# Altium PCB AMS.PcbDoc (part 1 of 3)
Units mm, origin at the board's own origin, x right, y up, seen from the top; angles counter-clockwise.
Board outline 150 x 60 mm, 4 copper layers (Top Layer, Layer 1, Layer 2, Bottom Layer), stack 0.603 mm thick; 208 components, 140 nets, 599 pads, 192 vias.
Unrouted connection lines stored in the file: 272.
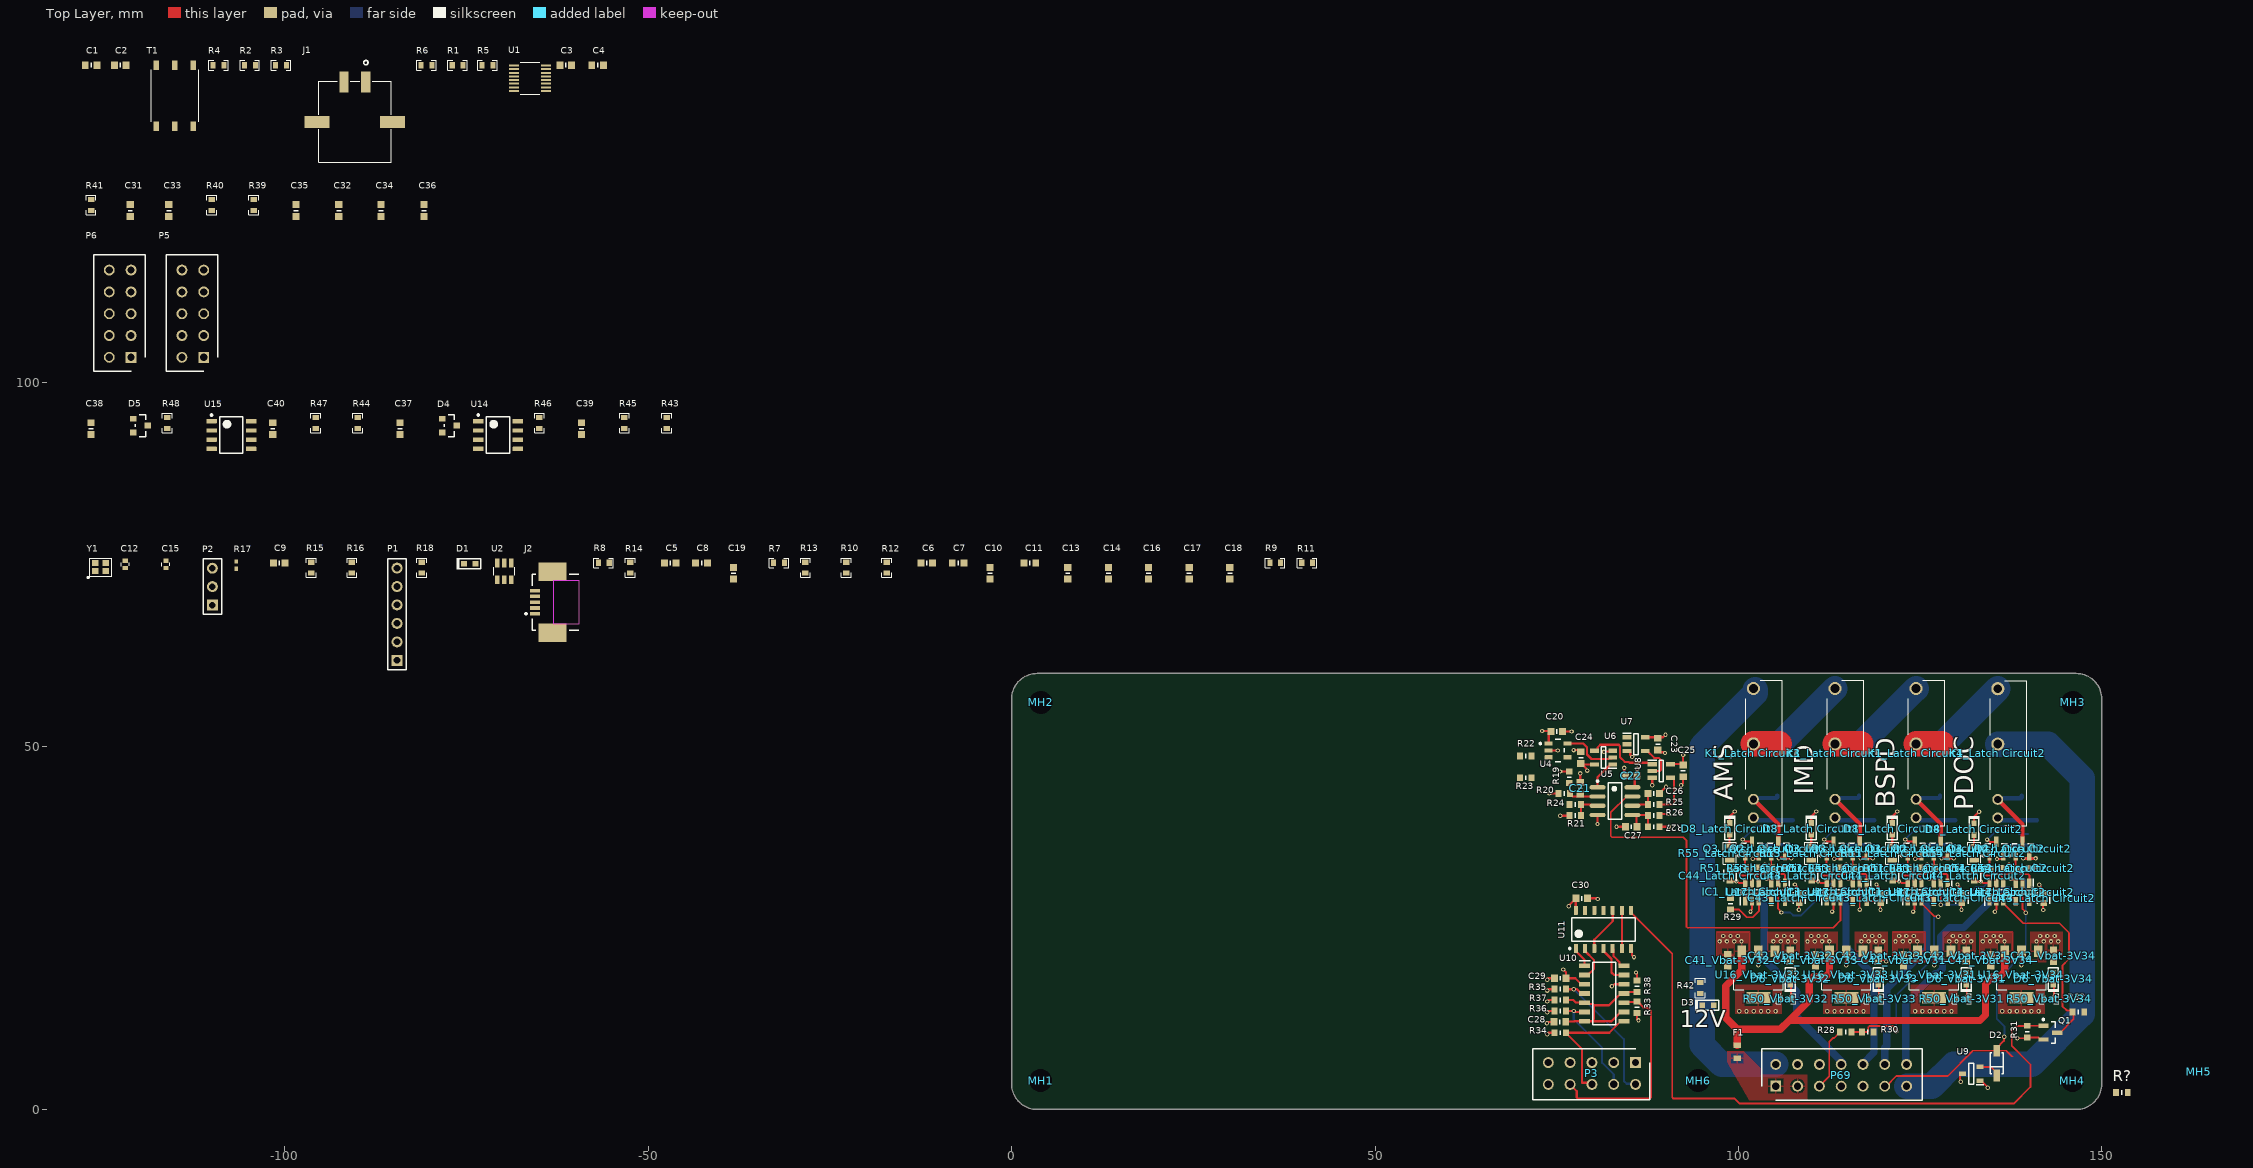
[diagram p0: Top Layer view]
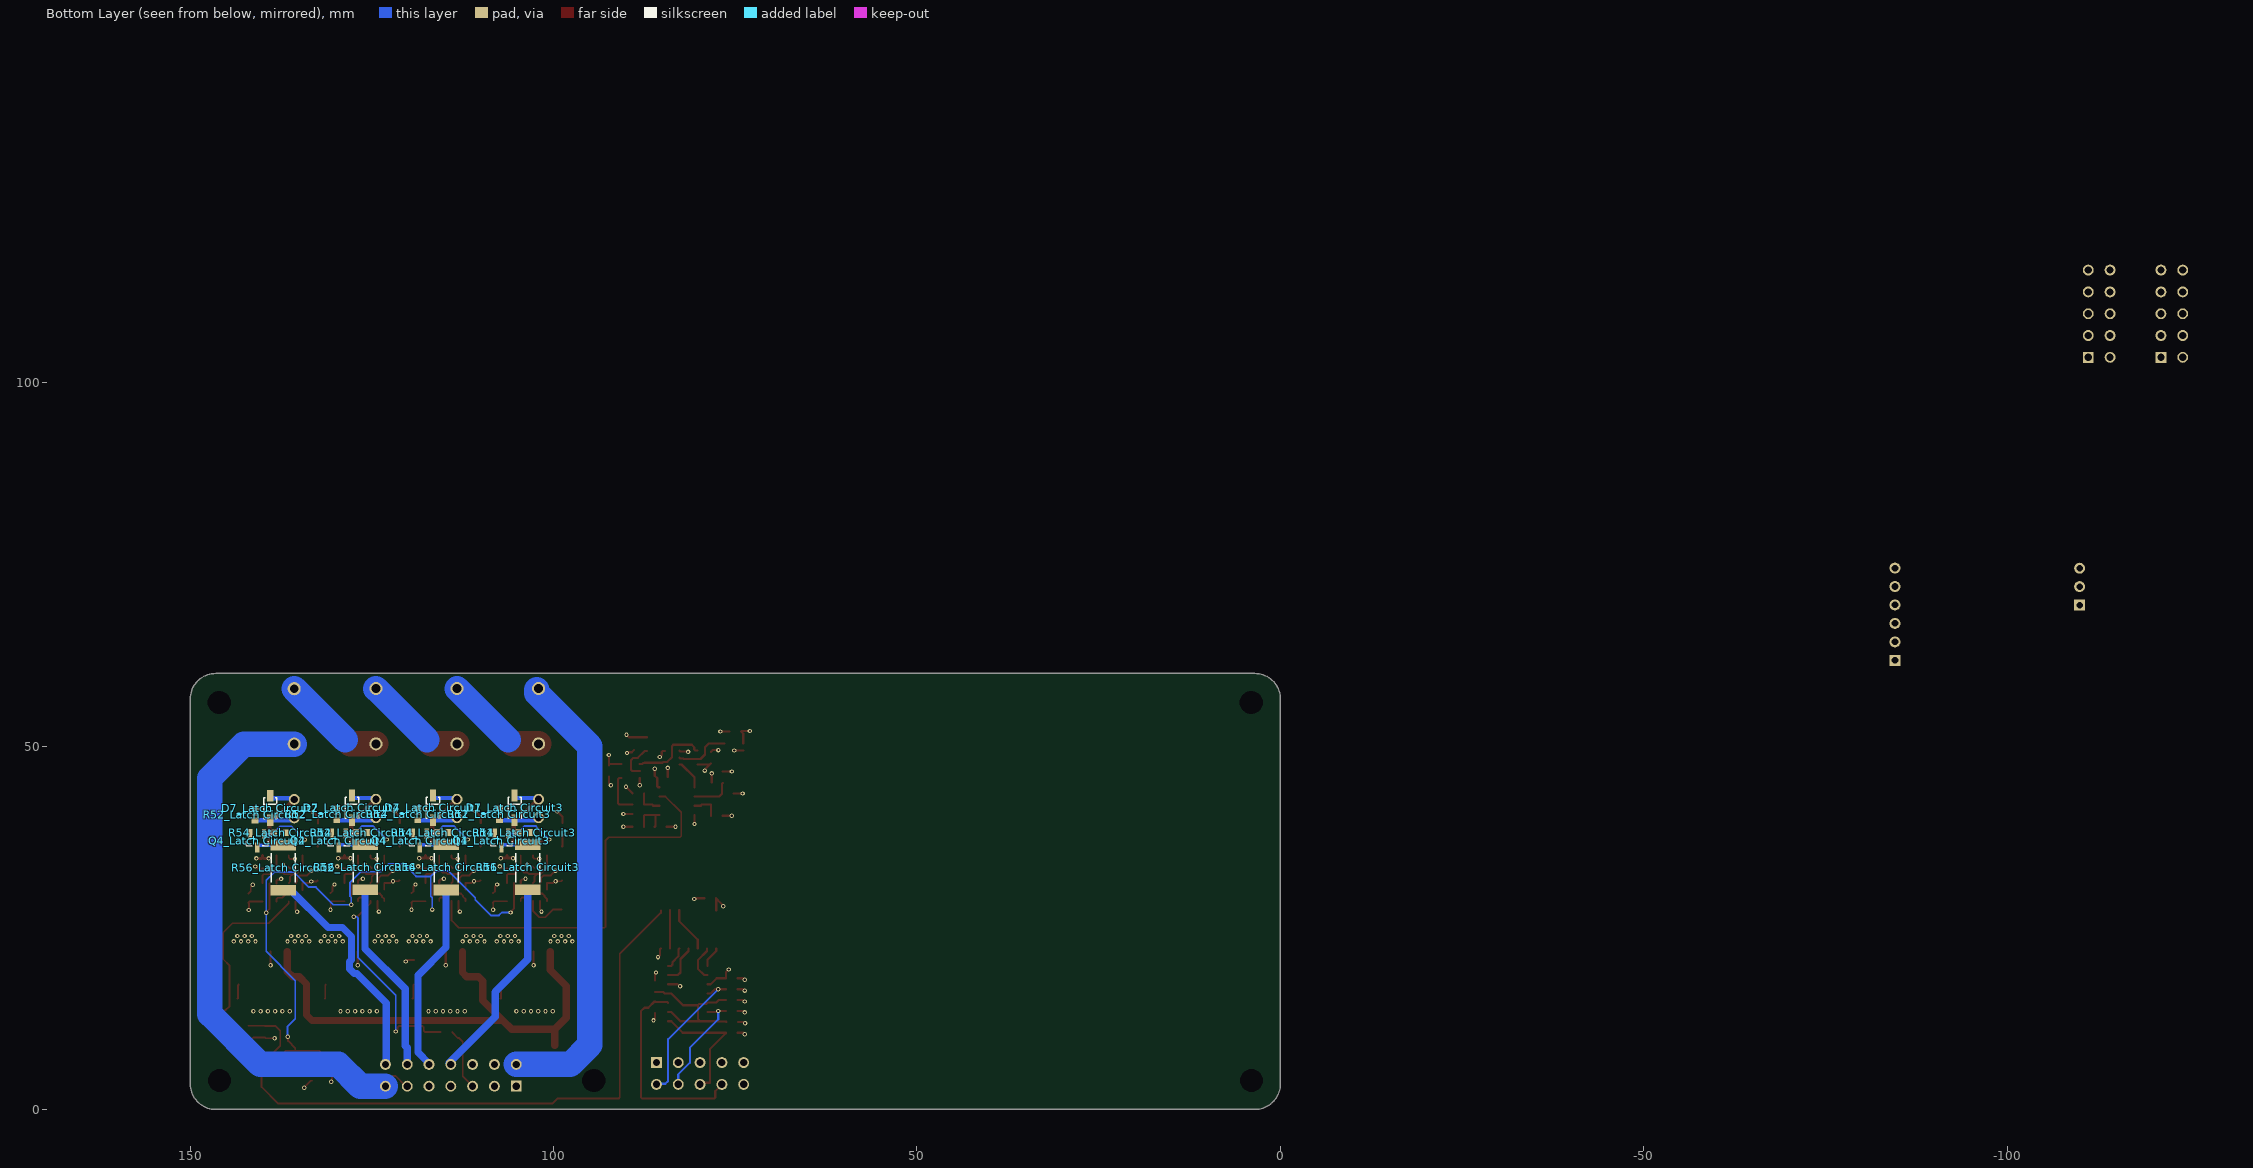
[diagram p1: Bottom Layer view, seen from below]
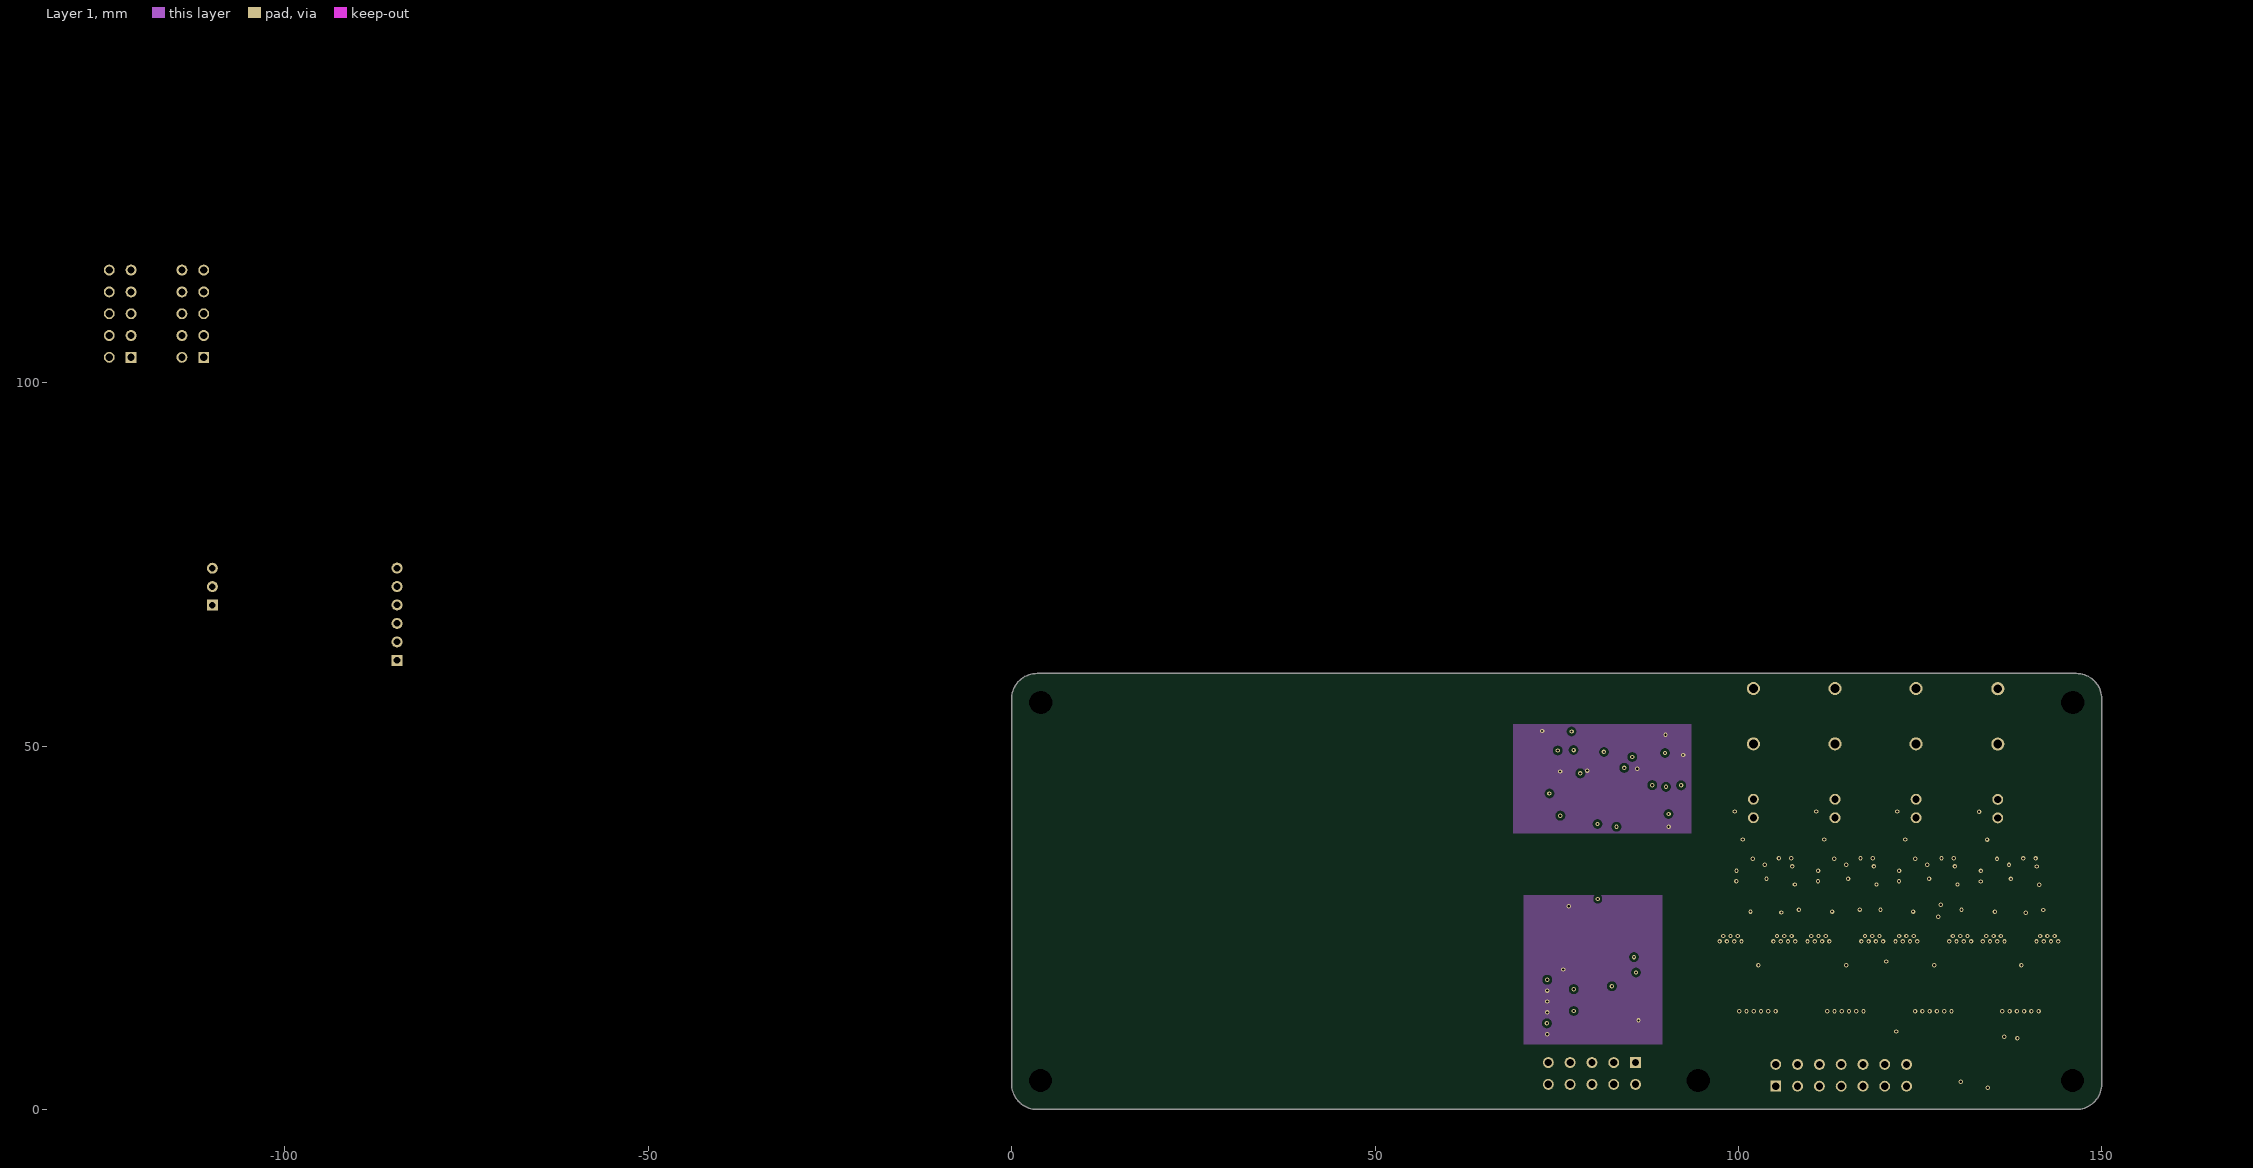
[diagram p2: Layer 1]

## Layer stack, top to bottom
Top Solder: solder mask 0.0102, Solder Resist, Dk 3.5
Top Layer: signal copper 0.0356
Dielectric 2: prepreg 0.0711, PP-006, Dk 4.1
Layer 1: signal copper 0.035
Dielectric 1: dielectric 0.32, FR-4, Dk 4.8
Layer 2: signal copper 0.035
Dielectric 3: prepreg 0.0711, PP-006, Dk 4.1
Bottom Layer: signal copper 0.0356
Bottom Solder: solder mask 0.0102, Solder Resist, Dk 3.5

## Board outline
3.5,0 cw(c3.5,3.5) 0,3.5 0,56.5 cw(c3.5,56.5) 3.5,60 146.5,60 cw(c146.5,56.5) 150,56.5 150,3.5 cw(c146.5,3.5) 146.5,0

## Design rules (kind name [scope] priority, off if disabled: settings)
BoardOutlineClearance [All] p1: gap=0.5 ignorepadtopadclearanceinfootprint=FALSE
Clearance [All] p1: gap=0.254 ignorepadtopadclearanceinfootprint=FALSE except(0.1: Arc-Arc Arc-Track Track-Track; 0.15: SMDPad-SMDPad SMDPad-THPad; 0.2: Arc-SMDPad Arc-THPad Track-SMDPad Track-THPad; 0.5: Arc-Hole Track-Hole SMDPad-Hole THPad-Hole Via-Hole Fill-Hole Poly-Hole Region-Hole Text-Hole)
DiffPairsRouting BSPD_Diff [All] p1: maxlimit=0.254 minlimit=0.254 mostfreqgap=0.254 toplayer_minwidth=0.381 toplayer_maxwidth=0.381 toplayer_prefwidth=0.381 midlayer1_minwidth=0.381 midlayer1_maxwidth=0.381 midlayer1_prefwidth=0.381 midlayer2_minwidth=0.381 midlayer2_maxwidth=0.381 midlayer2_prefwidth=0.381 bottomlayer_minwidth=0.381 bottomlayer_maxwidth=0.381 bottomlayer_prefwidth=0.381 maxuncoupledlength=12.7
DiffPairsRouting USB_Diff [InNetClass('USB_Diff')] p2: maxlimit=0.254 minlimit=0.254 mostfreqgap=0.254 toplayer_minwidth=0.381 toplayer_maxwidth=0.381 toplayer_prefwidth=0.381 midlayer1_minwidth=0.381 midlayer1_maxwidth=0.381 midlayer1_prefwidth=0.381 midlayer2_minwidth=0.381 midlayer2_maxwidth=0.381 midlayer2_prefwidth=0.381 bottomlayer_minwidth=0.381 bottomlayer_maxwidth=0.381 bottomlayer_prefwidth=0.381 maxuncoupledlength=12.7
DiffPairsRouting CAN_Diff [InNetClass('CAN_Diff')] p3: maxlimit=0.254 minlimit=0.254 mostfreqgap=0.254 toplayer_minwidth=0.381 toplayer_maxwidth=0.381 toplayer_prefwidth=0.381 midlayer1_minwidth=0.381 midlayer1_maxwidth=0.381 midlayer1_prefwidth=0.381 midlayer2_minwidth=0.381 midlayer2_maxwidth=0.381 midlayer2_prefwidth=0.381 bottomlayer_minwidth=0.381 bottomlayer_maxwidth=0.381 bottomlayer_prefwidth=0.381 maxuncoupledlength=12.7
DiffPairsRouting [All] p4: maxlimit=0.254 minlimit=0.254 mostfreqgap=0.254 toplayer_minwidth=0.381 toplayer_maxwidth=0.381 toplayer_prefwidth=0.381 midlayer1_minwidth=0.381 midlayer1_maxwidth=0.381 midlayer1_prefwidth=0.381 midlayer2_minwidth=0.381 midlayer2_maxwidth=0.381 midlayer2_prefwidth=0.381 bottomlayer_minwidth=0.381 bottomlayer_maxwidth=0.381 bottomlayer_prefwidth=0.381 maxuncoupledlength=12.7
HoleSize [All] p1: absolutevalues=TRUE maxlimit=6 minlimit=0.2 maxpercent=80.000 minpercent=20.000
MinimumSolderMaskSliver [All] p1: minsoldermaskwidth=0.2
PlaneConnect [All] p1: pad.planeconnectstyle=Relief pad.reliefexpansion=0.508 pad.reliefentries=4 pad.reliefconductorwidth=0.254 pad.reliefairgap=0.254 via.planeconnectstyle=Direct via.reliefexpansion=0.508 via.reliefentries=4 via.reliefconductorwidth=0.254 via.reliefairgap=0.254
PolygonConnect [All] p1: thpad.connectstyle=Relief thpad.reliefconductorwidth=0.254 thpad.reliefentries=4 thpad.polygonreliefangle="90 Angle" thpad.airgapwidth=0.254 smdpad.connectstyle=Relief smdpad.reliefconductorwidth=0.254 smdpad.reliefentries=4 smdpad.polygonreliefangle="90 Angle" smdpad.airgapwidth=0.254 via.connectstyle=Direct via.reliefconductorwidth=0.254 via.reliefentries=4 via.polygonreliefangle="90 Angle" via.airgapwidth=0.254
RoomDefinition "BSPD - AMS" [InComponentClass('BSPD - AMS')] p1: confinementstyle=ConfineIn formatcopy=TRUE lockcomponents=FALSE outline 69,37.85 93.45,37.85 93.45,53.05 69,53.05
RoomDefinition "PDOC - AMS" [InComponentClass('PDOC - AMS')] p2: confinementstyle=ConfineIn formatcopy=TRUE lockcomponents=FALSE outline 70.05,-0.05 89.65,-0.05 89.65,30.15 70.05,30.15
RoomDefinition Vbat-3V33 [InComponentClass('Vbat-3V33')] p3: confinementstyle=ConfineIn formatcopy=TRUE lockcomponents=FALSE outline 120.85,24.55 108.95,24.55 108.95,12.95 120.85,12.95
RoomDefinition "Latch Circuit1" [InComponentClass('Latch Circuit1')] p4: confinementstyle=ConfineIn formatcopy=TRUE lockcomponents=FALSE outline 108.825,25.399 120.825,25.399 120.825,59.849 108.825,59.849
RoomDefinition Vbat-3V32 [InComponentClass('Vbat-3V32')] p5: confinementstyle=ConfineIn formatcopy=TRUE lockcomponents=FALSE outline 108.75,24.55 96.85,24.55 96.85,12.95 108.75,12.95
RoomDefinition Vbat-3V31 [InComponentClass('Vbat-3V31')] p6: confinementstyle=ConfineIn formatcopy=TRUE lockcomponents=FALSE outline 132.95,24.55 121.05,24.55 121.05,12.95 132.95,12.95
RoomDefinition "Latch Circuit2" [InComponentClass('Latch Circuit2')] p7: confinementstyle=ConfineIn formatcopy=TRUE lockcomponents=FALSE outline 131.225,25.375 143.225,25.375 143.225,59.825 131.225,59.825
RoomDefinition "Latch Circuit3" [InComponentClass('Latch Circuit3')] p8: confinementstyle=ConfineIn formatcopy=TRUE lockcomponents=FALSE outline 97.6,25.4 109.6,25.4 109.6,59.85 97.6,59.85
RoomDefinition "Latch Circuit4" [InComponentClass('Latch Circuit4')] p9: confinementstyle=ConfineIn formatcopy=TRUE lockcomponents=FALSE outline 119.975,25.4 131.975,25.4 131.975,59.85 119.975,59.85
RoomDefinition Vbat-3V34 [InComponentClass('Vbat-3V34')] p10: confinementstyle=ConfineIn formatcopy=TRUE lockcomponents=FALSE outline 144.95,24.55 133.05,24.55 133.05,12.95 144.95,12.95
RoomDefinition "Iso SPI Comms" [InComponentClass('Iso SPI Comms')] p11: confinementstyle=ConfineIn formatcopy=TRUE lockcomponents=FALSE outline -127.477,129.899 -54.377,129.899 -54.377,147.199 -127.477,147.199
RoomDefinition "Ext Current Sense" [InComponentClass('Ext Current Sense')] p12: confinementstyle=ConfineIn formatcopy=TRUE lockcomponents=FALSE outline -127.577,122.899 -76.877,122.899 -76.877,128.499 -127.577,128.499
RoomDefinition CAN-Trans [InComponentClass('CAN-Trans')] p13: confinementstyle=ConfineIn formatcopy=TRUE lockcomponents=FALSE outline -127.577,89.799 -43.477,89.799 -43.477,98.499 -127.577,98.499
RoomDefinition BMS [InComponentClass('BMS')] p14: confinementstyle=ConfineIn formatcopy=TRUE lockcomponents=FALSE outline -127.477,60.299 43.223,60.299 43.223,78.599 -127.477,78.599
RoutingVias [All] p1: holewidth=0.3 width=0.6 viastyle="Through Hole" minholewidth=0.2 minwidth=0.4 maxholewidth=0.5 maxwidth=1
SilkToSolderMaskClearance [IsPad] p1: minsilkscreentomaskgap=0.15 clearancetoexposedcopper=TRUE
SolderMaskExpansion [All] p1: expansion=0.1 istentingtop=FALSE
Width [All] p1: maxlimit=5 minlimit=0.2 preferedwidth=0.254
25 further rules are at their usual default settings.

## Classes and differential pairs
component class Accumulator_MGMT: MH1 MH2 MH3 MH4 MH5 MH6
channel class "Latch - AMS": "Latch Circuit1" "Latch Circuit2" "Latch Circuit3" "Latch Circuit4"
component class "Latch Circuit4": "C43_Latch Circuit4" "C44_Latch Circuit4" "D7_Latch Circuit4" "D8_Latch Circuit4" "IC1_Latch Circuit4" "K1_Latch Circuit4" "Q2_Latch Circuit4" "Q3_Latch Circuit4" "Q4_Latch Circuit4" "R51_Latch Circuit4" "R52_Latch Circuit4" "R53_Latch Circuit4" "R54_Latch Circuit4" "R55_Latch Circuit4" "R56_Latch Circuit4" "U17_Latch Circuit4"
component class "Latch Circuit3": "C43_Latch Circuit3" "C44_Latch Circuit3" "D7_Latch Circuit3" "D8_Latch Circuit3" "IC1_Latch Circuit3" "K1_Latch Circuit3" "Q2_Latch Circuit3" "Q3_Latch Circuit3" "Q4_Latch Circuit3" "R51_Latch Circuit3" "R52_Latch Circuit3" "R53_Latch Circuit3" "R54_Latch Circuit3" "R55_Latch Circuit3" "R56_Latch Circuit3" "U17_Latch Circuit3"
component class "Latch Circuit2": "C43_Latch Circuit2" "C44_Latch Circuit2" "D7_Latch Circuit2" "D8_Latch Circuit2" "IC1_Latch Circuit2" "K1_Latch Circuit2" "Q2_Latch Circuit2" "Q3_Latch Circuit2" "Q4_Latch Circuit2" "R51_Latch Circuit2" "R52_Latch Circuit2" "R53_Latch Circuit2" "R54_Latch Circuit2" "R55_Latch Circuit2" "R56_Latch Circuit2" "U17_Latch Circuit2"
component class "Latch Circuit1": "C43_Latch Circuit1" "C44_Latch Circuit1" "D7_Latch Circuit1" "D8_Latch Circuit1" "IC1_Latch Circuit1" "K1_Latch Circuit1" "Q2_Latch Circuit1" "Q3_Latch Circuit1" "Q4_Latch Circuit1" "R51_Latch Circuit1" "R52_Latch Circuit1" "R53_Latch Circuit1" "R54_Latch Circuit1" "R55_Latch Circuit1" "R56_Latch Circuit1" "U17_Latch Circuit1"
differential pair class PRTA: PRTA
channel class "LVR - AMS": Vbat-3V31 Vbat-3V32 Vbat-3V33 Vbat-3V34
net class USB_Diff: USB_D_N USB_D_P
net class CAN_Diff: CAN1.Diff_N CAN1.Diff_P CAN2.Diff_N CAN2.Diff_P
component class Vbat-3V34: C41_Vbat-3V34 C42_Vbat-3V34 D6_Vbat-3V34 R50_Vbat-3V34 U16_Vbat-3V34
component class Vbat-3V33: C41_Vbat-3V33 C42_Vbat-3V33 D6_Vbat-3V33 R50_Vbat-3V33 U16_Vbat-3V33
component class Vbat-3V32: C41_Vbat-3V32 C42_Vbat-3V32 D6_Vbat-3V32 R50_Vbat-3V32 U16_Vbat-3V32
component class Vbat-3V31: C41_Vbat-3V31 C42_Vbat-3V31 D6_Vbat-3V31 R50_Vbat-3V31 U16_Vbat-3V31
component class "PDOC - AMS": C28 C29 C30 P3 R33 R34 R35 R36 R37 R38 U10 U11
component class "Iso SPI Comms": C1 C2 C3 C4 J1 R1 R2 R3 R4 R5 R6 T1 U1
component class "Ext Current Sense": C31 C32 C33 C34 C35 C36 R39 R40 R41
component class Connectors: P5 P6 P69 R?
component class CAN-Trans: C37 C38 C39 C40 D4 D5 R43 R44 R45 R46 R47 R48 U14 U15
component class "BSPD - AMS": C20 C21 C22 C23 C24 C25 C26 C27 R19 R20 R21 R22 R23 R24 R25 R26 R27 U4 U5 U6 U7 U8
component class BMS: C5 C6 C7 C8 C9 C10 C11 C12 C13 C14 C15 C16 C17 C18 C19 D1 J2 P1 P2 R7 R8 R9 R10 R11 R12 R13 R14 R15 R16 R17 R18 U2 Y1
differential pair USB_D: +USB_D_P -USB_D_N
differential pair PRTA: +PRTA_P -PRTA_N
differential pair CAN2.Diff: +CAN2.Diff_P -CAN2.Diff_N
differential pair CAN1.Diff: +CAN1.Diff_P -CAN1.Diff_N

## Components (designator, comment, footprint, x,y, rotation, side; value= is the part's Value field where it differs from the comment)
C1 "C" CAP0603 -126.677,143.699 r0 top value=10nF
C2 "C" CAP0603 -122.677,143.699 r0 top value=10nF
C3 "C" CAP0603 -61.377,143.699 r0 top value=100nF
C4 "C" CAP0603 -56.977,143.699 r0 top value=100nF
C5 "CL10B104KA8NNWC" CAP0603 -46.977,75.199 r0 top value=100nF
C6 "CL10B104KA8NNWC" CAP0603 -11.677,75.199 r0 top value=100nF
C7 "CL10B104KA8NNWC" CAP0603 -7.377,75.199 r0 top value=100nF
C8 "CL10B104KA8NNWC" CAP0603 -42.677,75.199 r0 top value=100nF
C9 "C" CAP0603 -100.777,75.199 r0 top value=100nF
C10 "C" CAP0603 -2.977,73.799 r90 top value=4.7uF
C11 "C" CAP0603 2.523,75.199 r0 top value=100nF
C12 "C" 0402#1 -121.977,74.499 r90 top value=12pF
C13 "C" CAP0603 7.723,73.799 r90 top value=100nF
C14 "C" CAP0603 13.323,73.799 r90 top value=100nF
C15 "C" 0402#1 -116.377,74.499 r90 top value=12pF
C16 "C" CAP0603 18.823,73.799 r90 top value=100nF
C17 "C" CAP0603 24.423,73.799 r90 top value=100nF
C18 "C" CAP0603 30.023,73.799 r90 top value=1uF
C19 "C" CAP0603 -38.277,73.799 r90 top value=2.2uF
C20 "Cap" CAP0603 75,52 r180 top value=0.1uf
C21 "Cap" CAP0603 78.25,44.2 r270 top value=0.1uf
C22 "Cap" CAP0603 85.275,45.925 r0 top value=0.1uf
C23 "Cap" CAP0603 88.925,50.275 r90 top value=0.1uf
C24 "Cap" CAP0603 78.325,48.425 r270 top value=0.1uf
C25 "Cap" CAP0603 92.4,46.575 r90 top value=0.1uf
C26 "Cap" CAP0603 88.35,43.475 r180 top value=0.1uf
C27 "Cap" CAP0603 85.275,38.9 r0 top value=0.1uf
C28 "Cap" CAP0603 75.45,12.05 r0 top value=0.1uf
C29 "Cap" CAP0603 75.5,18.05 r0 top value=100nF
C30 "Cap" CAP0603 78.45,29.05 r180 top value=100nF
C31 "C" CAP0603 -121.277,123.699 r90 top value=100nF
C32 "C" CAP0603 -92.577,123.699 r90 top value=100nF
C33 "C" CAP0603 -115.977,123.699 r90 top value=100nF
C34 "C" CAP0603 -86.777,123.699 r90 top value=100nF
C35 "C" CAP0603 -98.477,123.699 r90 top value=2uF
C36 "C" CAP0603 -80.877,123.699 r90 top value=2uF
C37 "C" CAP0603 -84.177,93.699 r90 top value=100nF
C38 "C" CAP0603 -126.677,93.699 r90 top value=100nF
C39 "C" CAP0603 -59.177,93.699 r90 top value=100nF
C40 "C" CAP0603 -101.677,93.699 r90 top value=100nF
C41_Vbat-3V31 "C" CAP0603 122.725,20.55 r90 top value=0.33uF (schematic designator C41)
C41_Vbat-3V32 "C" CAP0603 98.525,20.55 r90 top value=0.33uF (schematic designator C41)
C41_Vbat-3V33 "C" CAP0603 110.625,20.55 r90 top value=0.33uF (schematic designator C41)
C41_Vbat-3V34 "C" CAP0603 134.725,20.55 r90 top value=0.33uF (schematic designator C41)
C42_Vbat-3V31 "C" CAP0603 131.35,21.125 r90 top value=100nF (schematic designator C42)
C42_Vbat-3V32 "C" CAP0603 107.15,21.125 r90 top value=100nF (schematic designator C42)
C42_Vbat-3V33 "C" CAP0603 119.25,21.125 r90 top value=100nF (schematic designator C42)
C42_Vbat-3V34 "C" CAP0603 143.35,21.125 r90 top value=100nF (schematic designator C42)
"C43_Latch Circuit1" "0.1uF" FP-C0603-CJ-MFG 119.6,29.099 r270 top value=100nF (schematic designator C43)
"C43_Latch Circuit2" "0.1uF" FP-C0603-CJ-MFG 142,29.075 r270 top value=100nF (schematic designator C43)
"C43_Latch Circuit3" "0.1uF" FP-C0603-CJ-MFG 108.375,29.1 r270 top value=100nF (schematic designator C43)
"C43_Latch Circuit4" "0.1uF" FP-C0603-CJ-MFG 130.75,29.1 r270 top value=100nF (schematic designator C43)
"C44_Latch Circuit1" "0.1uF" FP-C0603-CJ-MFG 110.075,32.174 r90 top value=100nF (schematic designator C44)
"C44_Latch Circuit2" "0.1uF" FP-C0603-CJ-MFG 132.475,32.15 r90 top value=100nF (schematic designator C44)
"C44_Latch Circuit3" "0.1uF" FP-C0603-CJ-MFG 98.85,32.175 r90 top value=100nF (schematic designator C44)
"C44_Latch Circuit4" "0.1uF" FP-C0603-CJ-MFG 121.225,32.175 r90 top value=100nF (schematic designator C44)
D1 "150060BS55040" "LED (0603)" -74.577,75.099 r0 top
D2 "1N4148" 425 135.55,6.375 r90 top
D3 "150060SS55040" "LED (0603)" 95.825,14.35 r0 top
D4 "SZNUP3105LT3G" FP-318-08-MFG -77.377,94.099 r0 top value=30pF
D5 "SZNUP3105LT3G" FP-318-08-MFG -119.877,94.099 r0 top value=30pF
D6_Vbat-3V31 "150060GS55040" "LED (0603)" 131.35,17.975 r90 top (schematic designator D6)
D6_Vbat-3V32 "150060GS55040" "LED (0603)" 107.15,17.975 r90 top (schematic designator D6)
D6_Vbat-3V33 "150060GS55040" "LED (0603)" 119.25,17.975 r90 top (schematic designator D6)
D6_Vbat-3V34 "150060GS55040" "LED (0603)" 143.35,17.975 r90 top (schematic designator D6)
"D7_Latch Circuit1" "1N4148" 425 116.6,41.499 r270 bottom (schematic designator D7)
"D7_Latch Circuit2" "1N4148" 425 139,41.475 r270 bottom (schematic designator D7)
"D7_Latch Circuit3" "1N4148" 425 105.375,41.5 r270 bottom (schematic designator D7)
"D7_Latch Circuit4" "1N4148" 425 127.75,41.5 r270 bottom (schematic designator D7)
"D8_Latch Circuit1" "150060SS55040" "LED (0603)" 110.025,38.599 r270 top (schematic designator D8)
"D8_Latch Circuit2" "150060SS55040" "LED (0603)" 132.425,38.575 r270 top (schematic designator D8)
"D8_Latch Circuit3" "150060SS55040" "LED (0603)" 98.8,38.6 r270 top (schematic designator D8)
"D8_Latch Circuit4" "150060SS55040" "LED (0603)" 121.175,38.6 r270 top (schematic designator D8)
F1 "0494.500NRHF" 0494.500NRHF 99.85,7.025 r0 top value=500mA
"IC1_Latch Circuit1" "74LVC1G373DBVRE4" SN74LVC1G373 113.1,29.924 r90 top (schematic designator IC1)
"IC1_Latch Circuit2" "74LVC1G373DBVRE4" SN74LVC1G373 135.5,29.9 r90 top (schematic designator IC1)
"IC1_Latch Circuit3" "74LVC1G373DBVRE4" SN74LVC1G373 101.875,29.925 r90 top (schematic designator IC1)
"IC1_Latch Circuit4" "74LVC1G373DBVRE4" SN74LVC1G373 124.25,29.925 r90 top (schematic designator IC1)
J1 "2-1445057-2" TE_2-1445057-2 -90.377,135.899 r0 top
J2 "UX60SC-MB-5ST(80)" HIRO-UX60SC-MB-5ST(80)_V -65.577,69.799 r90 top
"K1_Latch Circuit1" "PCN-112D3MHZ" PCN-112D3MHZ 112.132,26.88 r90 top (schematic designator K1)
"K1_Latch Circuit2" "PCN-112D3MHZ" PCN-112D3MHZ 134.532,26.856 r90 top (schematic designator K1)
"K1_Latch Circuit3" "PCN-112D3MHZ" PCN-112D3MHZ 100.907,26.881 r90 top (schematic designator K1)
"K1_Latch Circuit4" "PCN-112D3MHZ" PCN-112D3MHZ 123.282,26.881 r90 top (schematic designator K1)
MH1 "M3 Mounting Hole" "M3 MH" 4,4 r0 top
MH2 "M3 Mounting Hole" "M3 MH" 4.025,56.025 r0 top
MH3 "M3 Mounting Hole" "M3 MH" 146.025,56.025 r0 top
MH4 "M3 Mounting Hole" "M3 MH" 146,4 r0 top
MH5 "M3 Mounting Hole" "M3 MH" 163.377,5.195 r0 top
MH6 "M3 Mounting Hole" "M3 MH" 94.5,4 r0 top
P1 "SWD" HDR1X6 -84.577,61.799 r90 top
P2 "UART" HDR1X3 -109.977,69.399 r90 top value=-
P3 "4-794632-0" SHDR10W82P300_2X5_1586X686X944P 85.85,6.45 r180 top
P5 "4-794632-0" SHDR10W82P300_2X5_1586X686X944P -111.177,103.499 r90 top
P6 "4-794632-0" SHDR10W82P300_2X5_1586X686X944P -121.177,103.499 r90 top
P69 "4-794632-4" 4-794632-4 105.15,3.2 r0 top
Q1 "BSS138BK,215" NXP-SOT23_N 142.925,10.575 r0 top
"Q2_Latch Circuit1" "BSS138BK,215" NXP-SOT23_N 116.7,35.899 r90 top (schematic designator Q2)
"Q2_Latch Circuit2" "BSS138BK,215" NXP-SOT23_N 139.1,35.875 r90 top (schematic designator Q2)
"Q2_Latch Circuit3" "BSS138BK,215" NXP-SOT23_N 105.475,35.9 r90 top (schematic designator Q2)
"Q2_Latch Circuit4" "BSS138BK,215" NXP-SOT23_N 127.85,35.9 r90 top (schematic designator Q2)
"Q3_Latch Circuit1" "BSS138BK,215" NXP-SOT23_N 113.1,35.899 r90 top (schematic designator Q3)
"Q3_Latch Circuit2" "BSS138BK,215" NXP-SOT23_N 135.5,35.875 r90 top (schematic designator Q3)
"Q3_Latch Circuit3" "BSS138BK,215" NXP-SOT23_N 101.875,35.9 r90 top (schematic designator Q3)
"Q3_Latch Circuit4" "BSS138BK,215" NXP-SOT23_N 124.25,35.9 r90 top (schematic designator Q3)
"Q4_Latch Circuit1" "BSS138BK,215" NXP-SOT23_N 118.4,36.999 r270 bottom (schematic designator Q4)
"Q4_Latch Circuit2" "BSS138BK,215" NXP-SOT23_N 140.8,36.975 r270 bottom (schematic designator Q4)
"Q4_Latch Circuit3" "BSS138BK,215" NXP-SOT23_N 107.175,37 r270 bottom (schematic designator Q4)
"Q4_Latch Circuit4" "BSS138BK,215" NXP-SOT23_N 129.55,37 r270 bottom (schematic designator Q4)
R1 "Resistor" R-0603 -76.977,143.699 r0 top value=51
R2 "Resistor" R-0603 -105.577,143.699 r0 top value=51
R3 "RB1" R-0603 -101.277,143.699 r0 top value=2.8k
R4 "Resistor" R-0603 -109.877,143.699 r0 top value=1.21k
R5 "NP" R-0603 -72.877,143.699 r0 top value=0
R6 "NP" R-0603 -81.277,143.699 r0 top value=0
R7 "CR0603AFX-5101EAS" R-0603 -32.777,75.199 r0 top value=5k
R8 "SFR03EZPF1001" R-0603 -56.877,75.199 r0 top value=1k
R9 "CR0603AFX-5101EAS" R-0603 35.523,75.199 r0 top value=5k
R10 "SFR03EZPF1001" R-0603 -22.777,73.799 r90 top value=1k
R11 "CR0603AFX-5101EAS" R-0603 39.923,75.199 r0 top value=5k
R12 "SFR03EZPF1001" R-0603 -17.177,73.799 r90 top value=1k
R13 "CR0603AFX-5101EAS" R-0603 -28.377,73.799 r90 top value=5k
R14 "SFR03EZPF1001" R-0603 -52.477,73.799 r90 top value=1k
R15 "Resistor" R-0603 -96.377,73.799 r90 top value=10k
R16 "Resistor" R-0603 -90.777,73.799 r90 top value=10k
R17 "Resistor" 0402#2 -106.677,74.899 r90 top value=R
R18 "Resistor" R-0603 -81.177,73.799 r90 top value=1k
R19 "Res1" RESC1608X55N 76.725,45.7 r90 top value=7k
R20 "Res1" RESC1608X55N 76.05,43.475 r0 top value=10k
R21 "Res1" RESC1608X55N 77.55,40.425 r0 top value=10k
R22 "Res1" RESC1608X55N 70.75,48.625 r180 top value=10k
R23 "Res1" RESC1608X55N 70.75,45.65 r180 top value=10k
R24 "Res1" RESC1608X55N 77.55,41.95 r180 top value=5k
R25 "Res1" RESC1608X55N 88.35,41.95 r0 top value=220K
R26 "Res1" RESC1608X55N 88.35,40.425 r180 top value=36.5K
R27 "Res1" RESC1608X55N 88.35,38.9 r0 top value=36.5K
R28 "Res1" RESC1608X55N 114.75,10.675 r180 top value=1.78k
R29 "10k" RESC1608X55N 98.925,28.3 r90 top
R30 "Res1" RESC1608X55N 117.8,10.675 r180 top value=420R
R31 "10k" RESC1608X55N 139.75,10.713 r90 top
R32 "10k" RESC1608X55N 146.8,13.4 r0 top
R33 "1.58k" RESC1608X55N 86.05,14.05 r270 top
R34 "1.58k" RESC1608X55N 75.5,10.55 r180 top
R35 "1.58k" RESC1608X55N 75.5,16.55 r180 top
R36 "1.58k" RESC1608X55N 75.5,13.55 r180 top
R37 "10k" RESC1608X55N 75.5,15.05 r180 top
R38 "10k" RESC1608X55N 86.05,16.95 r270 top
R39 "Resistor" R-0603 -104.277,123.699 r90 top value=500
R40 "Resistor" R-0603 -110.077,123.699 r90 top value=500
R41 "Resistor" R-0603 -126.677,123.699 r90 top value=0R
R42 "Resistor" R-0603 94.75,17.45 r270 top value=10k
R43 "Resistor" R-0603 -47.477,93.699 r90 top value=10K
R44 "Resistor" R-0603 -89.977,93.699 r90 top value=10K
R45 "Resistor" R-0603 -53.277,93.699 r90 top value=60
R46 "Resistor" R-0603 -64.977,93.699 r90 top value=60
R47 "Resistor" R-0603 -95.777,93.699 r90 top value=60
R48 "Resistor" R-0603 -116.177,93.699 r90 top value=60
R50_Vbat-3V31 "Resistor" R-0603 130,15.25 r0 top value=1k (schematic designator R50)
R50_Vbat-3V32 "Resistor" R-0603 105.8,15.25 r0 top value=1k (schematic designator R50)
R50_Vbat-3V33 "Resistor" R-0603 117.9,15.25 r0 top value=1k (schematic designator R50)
R50_Vbat-3V34 "Resistor" R-0603 142,15.25 r0 top value=1k (schematic designator R50)
"R51_Latch Circuit1" "10k" RESC1608X55N 113.1,33.199 r180 top (schematic designator R51)
"R51_Latch Circuit2" "10k" RESC1608X55N 135.5,33.175 r180 top (schematic designator R51)
"R51_Latch Circuit3" "10k" RESC1608X55N 101.875,33.2 r180 top (schematic designator R51)
"R51_Latch Circuit4" "10k" RESC1608X55N 124.25,33.2 r180 top (schematic designator R51)
"R52_Latch Circuit1" "500R" RESC1608X55N 118.7,40.599 r90 bottom (schematic designator R52)
"R52_Latch Circuit2" "500R" RESC1608X55N 141.1,40.575 r90 bottom (schematic designator R52)
"R52_Latch Circuit3" "500R" RESC1608X55N 107.475,40.6 r90 bottom (schematic designator R52)
"R52_Latch Circuit4" "500R" RESC1608X55N 129.85,40.6 r90 bottom (schematic designator R52)
"R53_Latch Circuit1" "10k" RESC1608X55N 116.7,33.199 r180 top (schematic designator R53)
"R53_Latch Circuit2" "10k" RESC1608X55N 139.1,33.175 r180 top (schematic designator R53)
"R53_Latch Circuit3" "10k" RESC1608X55N 105.475,33.2 r180 top (schematic designator R53)
"R53_Latch Circuit4" "10k" RESC1608X55N 127.85,33.2 r180 top (schematic designator R53)
"R54_Latch Circuit1" "10k" RESC1608X55N 115.25,38.099 r180 bottom (schematic designator R54)
"R54_Latch Circuit2" "10k" RESC1608X55N 137.65,38.075 r180 bottom (schematic designator R54)
"R54_Latch Circuit3" "10k" RESC1608X55N 104.025,38.1 r180 bottom (schematic designator R54)
"R54_Latch Circuit4" "10k" RESC1608X55N 126.4,38.1 r180 bottom (schematic designator R54)
"R55_Latch Circuit1" "TBD" R_0805 110.05,36.224 r270 top value=649R (schematic designator R55)
"R55_Latch Circuit2" "TBD" R_0805 132.45,36.2 r270 top value=649R (schematic designator R55)
"R55_Latch Circuit3" "TBD" R_0805 98.825,36.225 r270 top value=649R (schematic designator R55)
"R55_Latch Circuit4" "TBD" R_0805 121.2,36.225 r270 top value=649R (schematic designator R55)
"R56_Latch Circuit1" "CRCW2512649RFKEG" RESC6332X06N 114.8,33.299 r270 bottom (schematic designator R56)
"R56_Latch Circuit2" "CRCW2512649RFKEG" RESC6332X06N 137.2,33.275 r270 bottom (schematic designator R56)
"R56_Latch Circuit3" "CRCW2512649RFKEG" RESC6332X06N 103.575,33.3 r270 bottom (schematic designator R56)
"R56_Latch Circuit4" "CRCW2512649RFKEG" RESC6332X06N 125.95,33.3 r270 bottom (schematic designator R56)
R? "10k" RESC1608X55N 152.777,2.345 r0 top
T1 "SM91502ALE" SM91502ALE -117.677,135.299 r0 top
U1 "LTC6820HMS#PBF" MSOP-16_MS -66.277,141.899 r0 top
U2 "USBLC6-2SC6" USBLC6-2SC6 -70.777,72.899 r0 top
U4 "SN65LVDT2DBVT" FP-DBV0005A-MFG 75.2,49.4 r0 top
U5 "MCP6542-I/SN" SOIC-SN8_N 83.025,42.425 r0 top
U6 "SN74LVC1G08MDBVREP" SOT95P280X145-5N 81.45,48.425 r180 top
U7 "NC7SZ00M5X" SOT95P280X125-5N 85.925,50.275 r0 top
U8 "NC7S32M5X" SOT95P275X110-5N 89.4,46.575 r0 top
U9 "MAX810STRG" SOT96P237X111-3N 132.05,4.9 r180 top
U10 "TLC3704QDRG4Q1" SOIC127P600X175-14N 81.55,15.95 r0 top
U11 "SN74HC7032D" D0014A_L 81.44,24.775 r90 top
U14 "SN65HVD233D" D0008A_N -70.677,92.799 r0 top
U15 "SN65HVD233D" D0008A_N -107.377,92.799 r0 top
U16_Vbat-3V31 "ZSR330GTA" ZSR330GTA 129.25,21.75 r180 top (schematic designator U16)
U16_Vbat-3V32 "ZSR330GTA" ZSR330GTA 105.05,21.75 r180 top (schematic designator U16)
U16_Vbat-3V33 "ZSR330GTA" ZSR330GTA 117.15,21.75 r180 top (schematic designator U16)
U16_Vbat-3V34 "ZSR330GTA" ZSR330GTA 141.25,21.75 r180 top (schematic designator U16)
"U17_Latch Circuit1" "NC7S32M5X" SOT95P275X110-5N 116.7,29.899 r270 top (schematic designator U17)
"U17_Latch Circuit2" "NC7S32M5X" SOT95P275X110-5N 139.1,29.875 r270 top (schematic designator U17)
"U17_Latch Circuit3" "NC7S32M5X" SOT95P275X110-5N 105.475,29.9 r270 top (schematic designator U17)
"U17_Latch Circuit4" "NC7S32M5X" SOT95P275X110-5N 127.85,29.9 r270 top (schematic designator U17)
Y1 "CX2016DB26000D0FLJCC" CX2016DB26000D0FLJCC -126.077,74.099 r0 top

## Footprints (in the part's own frame and the unit in brackets; to place one, negate y for a bottom-side part, rotate by r counter-clockwise, add the part's x,y. Pads: shape width x height; smd on the part's side, far side on the other; paste and mask are expansions set on the pad)
4-794632-4 [mm] "14 Way Micro MATE-N-LOK"
  rect 1.5x1.5 hole 1: 1(0,0)
  round 1.5 hole 1: 2(0,3) 3(3,0) 4(3,3) 5(6,0) 6(6,3) 7(9,0) 8(9,3) 9(12,0) 10(12,3) 11(15,0) 12(15,3) 13(18,0) 14(18,3)
  silkscreen extent -1.93,-1.93 20.13,5.13, body extent -3.51,-3.19 21.49,5.48, height 9.25
0402#1 [mm] "0402 Capacitor"
  rect 0.6x0.7 smd: 1(0,0) 2(1,0)
  silkscreen extent 0.28,-0.55 0.7,0.55, body extent 0,-0.25 1,0.25, height 0.26
0402#2 [mm] "Chip Capacitor, Body 1.0x0.5mm, IPC High Density"
  rect 0.6x0.5 smd: 1(-0.5,0) 2(0.5,0)
  body extent -0.55,-0.3 0.55,0.3, height 1.3
425 [mm] "SOD-123; 2 Leads; Body 2.7 x 1.6 mm, (LxW)"
  rect 1.6x0.85 smd: 1(-1.7,0) 2(1.7,0)
  silkscreen extent -1.45,-0.9 1.45,0.9
0494.500NRHF [mil] "500mA Fast Blow Fuse"
  rect 42.91x30 smd: 1(0,0) 2(0,70)
CAP0603 [mm] "Chip Capacitor, 2-Leads, Body 1.60x0.80mm, IPC Medium Density"
  rect 0.95x1 smd: 1(-0.8,0) 2(0.8,0)
  silkscreen extent 0,-0.3 0,0.3, body extent -0.87,-0.48 0.87,0.48, height 0.9
CX2016DB26000D0FLJCC [mm] "26 MHz"
  rect 0.9x0.8 smd: 1(0,0) 2(1.4,0) 3(1.4,1.1) 4(0,1.1)
  silkscreen extent -1.1,-1 2.25,1.75
D0008A_N [mm] "SOIC, 8-Leads, Body 5x4mm, Pitch 1.27mm, IPC Medium Density"
  rrect17% 1.45x0.6 smd: 1(-2.725,1.905) 2(-2.725,0.635) 3(-2.725,-0.635) 4(-2.725,-1.905) 5(2.725,-1.905) 6(2.725,-0.635) 7(2.725,0.635) 8(2.725,1.905)
  silkscreen extent -2.85,-2.5 1.6,2.88, body extent -3,-2.45 3,2.45, height 1.63
D0014A_L [mm] "SOIC, 14-Leads, Body 8.75x4mm, Pitch 1.27mm, IPC High Density"
  rrect18% 1.25x0.55 smd: 1(-2.625,3.81) 2(-2.625,2.54) 3(-2.625,1.27) 4(-2.625,0) 5(-2.625,-1.27) 6(-2.625,-2.54) 7(-2.625,-3.81) 8(2.625,-3.81) 9(2.625,-2.54) 10(2.625,-1.27) 11(2.625,0) 12(2.625,1.27) 13(2.625,2.54) 14(2.625,3.81)
  silkscreen extent -2.75,-4.38 1.6,4.76, body extent -3.02,-4.32 3.02,4.32, height 1.59
FP-318-08-MFG [mm]
  rect 0.9x0.8 smd paste+0 mask+0: 1(-1,0.95) 2(-1,-0.95) 3(1,0)
  silkscreen extent -0.7,-1.52 0.7,1.52, body extent -1.55,-1.62 1.55,1.62, height 0.25
FP-C0603-CJ-MFG [mm]
  rect 0.85x0.9 smd paste+0 mask+0: 1(-0.65,0) 2(0.65,0)
  silkscreen extent -0.8,-0.85 0.8,0.85, body extent -1.2,-0.6 1.2,0.6, height 0.25
FP-DBV0005A-MFG [mm]
  rrect17% 1.1x0.6 smd paste+0 mask+0: 1(-1.3,0.95) 2(-1.3,0) 3(-1.3,-0.95) 4(1.3,-0.95) 5(1.3,0.95)
  silkscreen extent -2.57,-1.53 0.87,1.53, body extent -1.95,-1.78 1.95,1.78, height 0.25
HDR1X3 [mm] "Connector; Header; 3 Position"
  rect 1.5x1.5 hole 0.9: 1(0,0)
  round 1.5 hole 0.9: 2(2.54,0) 3(5.08,0)
  silkscreen extent -1.27,-1.27 6.35,1.27
HDR1X6 [mm] "Connector; Header; 6 Position"
  rect 1.5x1.5 hole 0.9: 1(0,0)
  round 1.5 hole 0.9: 2(2.54,0) 3(5.08,0) 4(7.62,0) 5(10.16,0) 6(12.7,0)
  silkscreen extent -1.27,-1.27 13.97,1.27
HIRO-UX60SC-MB-5ST(80)_V [mm] "SMD, 5-Leads, Body 7.7x7mm, Pitch 0.8mm"
  rect 0.5x1.4 smd: 1(-1.6,0) 2(-0.8,0) 3(0,0) 4(0.8,0) 5(1.6,0)
  rect 2.5x3.8 smd: 6(-4.2,-2.4) 7(4.2,-2.4)
  Top Layer keep-out region: -2.95,-6.1 2.95,-6.1 2.95,-2.5 -2.95,-2.5
  silkscreen extent -3.85,-6 3.85,1.37, body extent -4.9,-6.62 4.9,0.38, height 3.95
"LED (0603)" [mm]
  rect 0.8x0.75 smd: 1(-0.8,0) 2(0.8,0)
  silkscreen extent -1.82,-0.77 1.5,0.77, body extent -0.82,-0.4 0.78,0.4, height 0.41
"M3 MH" [mm] "M3 Mounting Hole"
  round 0 hole 3.2 unplated: 1(-0.025,-0.025)
MSOP-16_MS [mil]
  rect 55x11 smd: 1(-86,68.95) 2(-86,49.25) 3(-86,29.55) 4(-86,9.85) 5(-86,-9.85) 6(-86,-29.55) 7(-86,-49.25) 8(-86,-68.95) 9(86,-68.95) 10(86,-49.25) 11(86,-29.55) 12(86,-9.85) 13(86,9.85) 14(86,29.55) 15(86,49.25) 16(86,68.95)
  round 11.81 on Top Overlay: ""(-65,95)
  silkscreen extent -53,-86 53,86, body extent -96,-80 98,80, height 44
NXP-SOT23_N [mm] "SOT23, 3-Leads, Body 3x1.4mm, Pitch 0.95mm, IPC Medium Density"
  rect 1.4x0.6 smd: 1(-0.95,0.95) 2(-0.95,-0.95) 3(0.95,0)
  silkscreen extent -1.07,-1.5 0.7,1.92, body extent -0.7,-1.5 0.7,1.5, height 1.1
PCN-112D3MHZ [mm]
  round 1.8 hole 1.2: 11(31.039,-1.168) 14(23.419,-1.168)
  round 1.5 hole 1: A1(13.259,-1.168) A2(15.799,-1.168)
  silkscreen extent 11.25,-5.12 32.15,-0.12, body extent 12.15,-5.12 32.15,-0.12, height 12.6
R-0603 [mm] "0603 Resistor"
  rect 0.7x0.9 smd: 1(0,0) 2(1.5,0)
  silkscreen extent -0.6,-0.67 2.07,0.67, body extent -0.08,-0.43 1.52,0.43, height 0.52
R_0805 [mm] "0805 Resistor"
  rect 0.7x1.3 smd: 1(0,0) 2(1.9,0)
  silkscreen extent -0.58,-0.9 2.47,0.87, body extent -0.06,-0.63 1.94,0.63, height 0.44
RESC1608X55N [mm]
  rect 0.8x0.95 smd: 1(-0.8,0) 2(0.8,0)
  silkscreen extent 0,-0.3 0,0.3, body extent -0.8,-0.4 0.8,0.4, height 0.55
RESC6332X06N [mm] "Chip Resistor, 2-Leads, Body 6.30x3.15mm, IPC Medium Density"
  rect 1.45x3.5 smd: 1(-3.1,0) 2(3.1,0)
  silkscreen extent -1.97,-1.65 2.03,1.65, body extent -3.25,-1.5 3.25,1.5, height 0.6
SHDR10W82P300_2X5_1586X686X944P [mm]
  rect 1.5x1.5 hole 1: 1(0,0)
  round 1.5 hole 1: 2(0,3) 3(3,0) 4(3,3) 5(6,0) 6(6,3) 7(9,0) 8(9,3) 9(12,0) 10(12,3)
  silkscreen extent -1.93,-1.93 14.13,5.13, body extent -3.53,-2.46 15.47,6.21, height 8.88
SM91502ALE [mm]
  rect 0.76x1.27 smd: 1(0,0) 2(2.54,0) 3(5.08,0) 4(5.08,8.38) 5(2.54,8.38) 6(0,8.38)
  round 0.3 on Top Overlay: ""(-1.15,0.725)
  silkscreen extent -0.75,0.63 5.83,7.75
SN74LVC1G373 [mm]
  rect 1.2x0.6 smd: 1(-1.25,0.95) 2(-1.25,0) 3(-1.25,-0.95) 4(1.25,-0.95) 5(1.25,0) 6(1.25,0.95)
  silkscreen extent -1.85,-1.45 0.3,1.6, body extent -1.4,-1.45 1.4,1.45, height 1.45
SOIC127P600X175-14N [mm]
  rect 1.525x0.65 smd: 1(-2.712,3.81) 2(-2.712,2.54) 3(-2.712,1.27) 4(-2.712,0) 5(-2.712,-1.27) 6(-2.712,-2.54) 7(-2.712,-3.81) 8(2.712,-3.81) 9(2.712,-2.54) 10(2.712,-1.27) 11(2.712,0) 12(2.712,1.27) 13(2.712,2.54) 14(2.712,3.81)
  silkscreen extent -3.47,-4.33 1.6,4.48, body extent -3,-4.32 3,4.32, height 1.75
SOIC-SN8_N [mm] "SOIC, 8-Leads, Body 4.9x3.9mm, Pitch 1.27mm, IPC Medium Density"
  oval 2.2x0.6 smd: 1(-2.4,1.905) 2(-2.4,0.635) 3(-2.4,-0.635) 4(-2.4,-1.905) 5(2.4,-1.905) 6(2.4,-0.635) 7(2.4,0.635) 8(2.4,1.905)
  silkscreen extent -2.52,-2.5 0.9,2.88, body extent -2,-2.5 2,2.5, height 1.75
SOT95P275X110-5N [mm]
  rect 1.25x0.6 smd: 1(-1.25,0.95) 2(-1.25,0) 3(-1.25,-0.95) 4(1.25,-0.95) 5(1.25,0.95)
  silkscreen extent -1.88,-1.5 0.28,1.5, body extent -1.38,-1.5 1.38,1.5, height 1.1
SOT95P280X125-5N [mm]
  rect 1.2x0.6 smd: 1(-1.25,0.95) 2(-1.25,0) 3(-1.25,-0.95) 4(1.25,-0.95) 5(1.25,0.95)
  silkscreen extent -1.85,-1.45 0.3,1.5, body extent -1.4,-1.45 1.4,1.45, height 1.25
SOT95P280X145-5N [mm]
  rect 1.2x0.6 smd: 1(-1.25,0.95) 2(-1.25,0) 3(-1.25,-0.95) 4(1.25,-0.95) 5(1.25,0.95)
  silkscreen extent -1.85,-1.45 0.3,1.5, body extent -1.4,-1.45 1.4,1.45, height 1.45
SOT96P237X111-3N [mm]
  rect 1x0.6 smd: 1(-1.2,0.955) 2(-1.2,-0.955) 3(1.2,0)
  silkscreen extent -1.7,-1.46 0.35,1.51, body extent -1.18,-1.46 1.18,1.46, height 1.11
TE_2-1445057-2 [mm]
  rect 1.27x2.92 smd: 1(1.5,5.48) 2(-1.5,5.48)
  rect 3.43x1.65 smd: P1(5.205,0) P2(-5.205,0)
  silkscreen extent -5,-5.58 5,8.45
USBLC6-2SC6 [mm] "SOT-23-6"
  rect 0.6x1.2 smd: 1(0,0) 2(0.95,0) 3(1.9,0) 4(1.9,2.3) 5(0.95,2.3) 6(0,2.3)
  round 0.3 on Top Overlay: ""(-0.725,0.325)
  silkscreen extent -0.5,0.6 2.4,1.7, body extent -0.5,-0.23 2.4,2.57, height 1.18
ZSR330GTA [mm] "3.3V 200mA LVR"
  rect 1.2x1.6 smd: 1(0,0) 2(2.3,0) 3(4.6,0)
  rect 3.3x1.6 smd: 4(2.3,6.4)
  silkscreen extent -1.1,3.3 5.7,5.3, body extent -0.95,-0.1 5.55,6.9, height 1.66